# Altium PCB CrashDAQ For Hammond 1554H.PcbDoc (part 2 of 2)
Units mil, origin at the board's own origin, x right, y up, seen from the top; angles counter-clockwise.
Board outline 6580.35 x 4200 mil, 2 copper layers (Top Layer, Bottom Layer); 109 components, 89 nets, 487 pads, 126 vias.
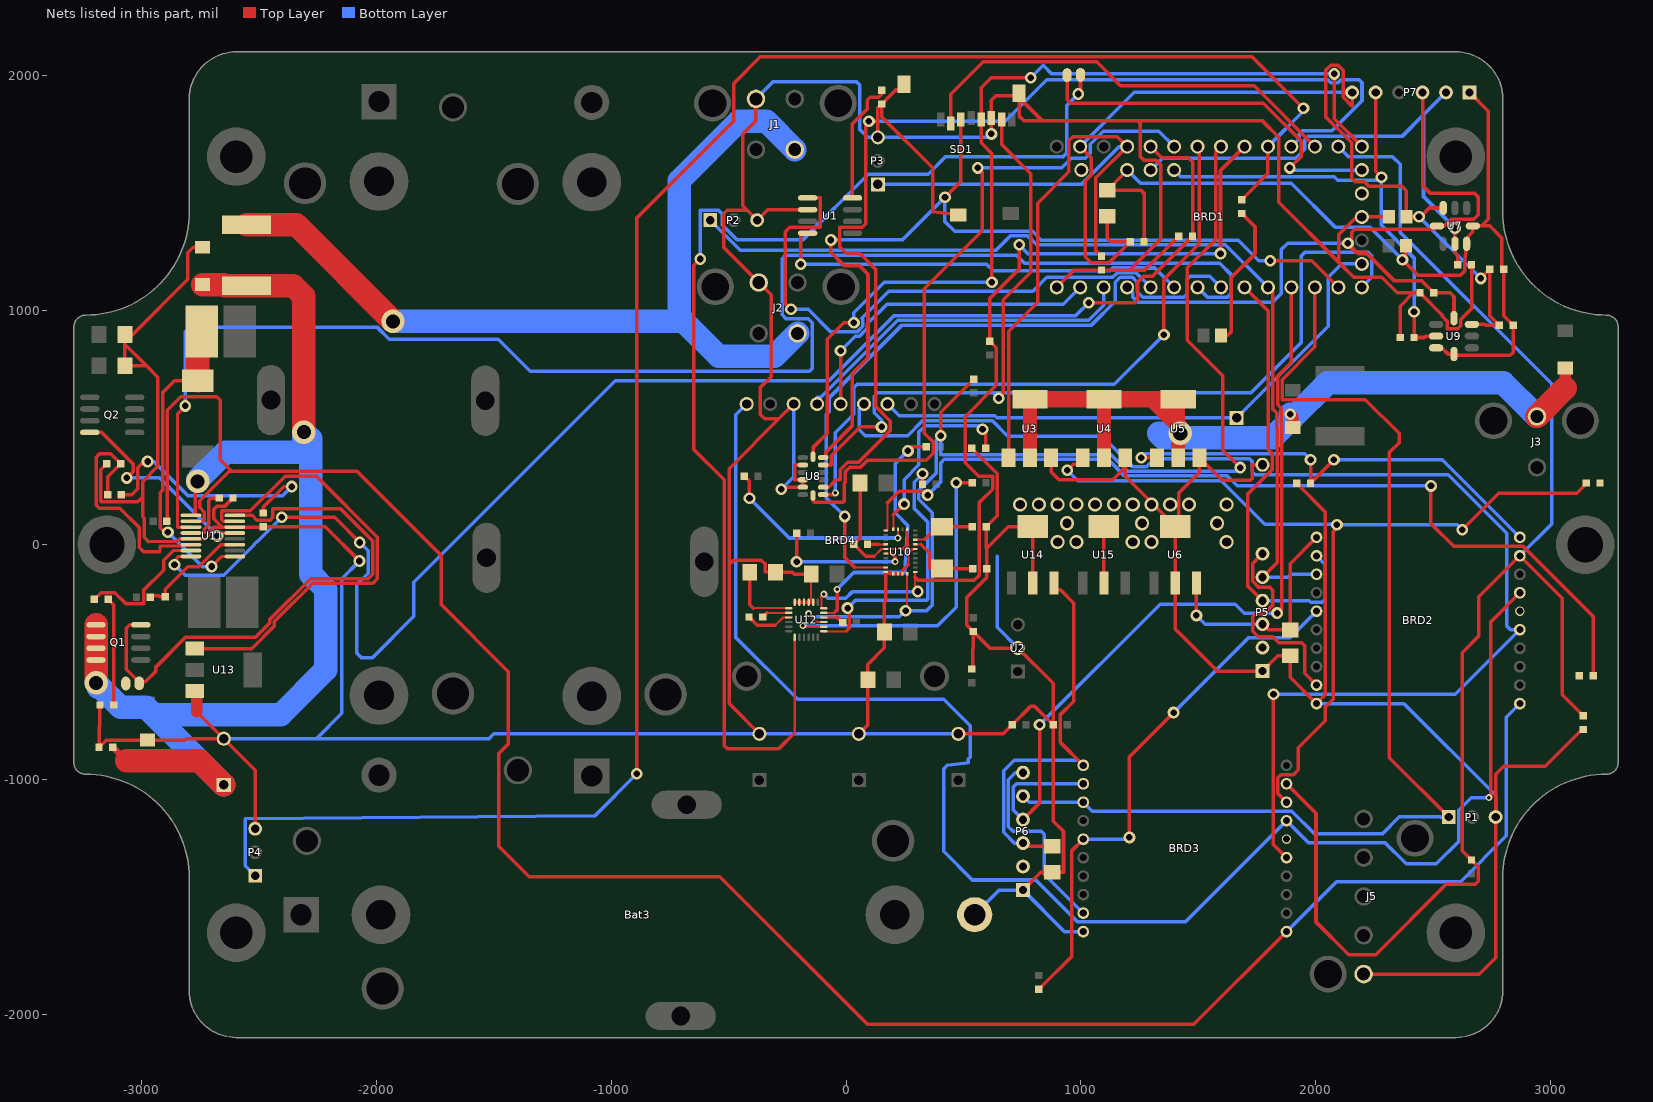
[diagram p2: the nets of this part, all layers, seen from the top]

## Via types
v1: diameter 50, hole 28, Top Layer to Bottom Layer, 80 vias
v2: diameter 60, hole 40, Top Layer to Bottom Layer, 19 vias
v3: diameter 100, hole 60, Top Layer to Bottom Layer, 19 vias
v4: diameter 30, hole 15, Top Layer to Bottom Layer, 8 vias

## Nets (pads, with @x,y where several pads share a name; then routed paths per layer and width w, separated by ;. In a path a pad name is that pad's centre, name@x,y a point inside that pad or via, vN(x,y) a via of type N, cw(c..) or ccw(c..) an arc to the next point about the centre after c; other vN are vias at no path point) (continued)
GND: Bat3.2 Batt1.2 BRD1.14 BRD1.17 BRD2.10 BRD3.10 BRD4.7 C3.2 C4.2 C5.1 C6.1 C7.2 C8.1 C9.1 C10.1 C12.1 C16.2 C17.1 C18.1 C19.2 C20.1 C21.1 C22.1 C23.1 C24.1 C25.1 C26.1 C27.1 C28.1 C29.1 C30.1 C31.1 C32.1 D3.1 J1.4 J2.4 J5.5 JP2.2 L2.1 NTC1.1 P1.3 P2.3 P3.3 P4.3 P5.1 P6.1 R1.1 R4.1 R8.1 R9.1 R10.1 R20.2 R21.1 R22.1 R26.1 SD1.6 U1.2 U2.2 U3.3 U4.3 U5.3 U6.2 U6.4 U8.2 U8.4 U8.5 U10.2 U10.10 U10.15 U10.16 U10.17 U10.18 U10.25 U11.5 U11.14 U12.2 U12.3 U12.4 U12.5 U12.6 U13.3 U14.2 U14.4 U15.2 U15.4 Z2.2 | length 33916.9
  Top Layer w8.86: C23.1@-148.62,-125 -148.62,-236.22 U12.2@-139.76,-245.08 ; 119.57,-49.54 150.85,-18.27 U10.10@169.54,-18.27 244.07,-18.27 ; U10.18@240.89,-124.53 240.89,-109.54 ; 260.58,-1.76 U10.2@260.58,65.47 265.3,-18.27 U10.25@294.48,-18.27 265.57,-31.04 265.57,-84.86
  Top Layer w14.17: -2972.42,13.25 -2851.08,13.25 -2839.43,24.9 U11.5@-2791.34,24.9 -2730.93,24.9 -2715.71,40.11 -2715.71,56.46 -2697.27,74.9 -2658.4,74.9 ; -2693.43,109.92 -2658.4,74.9 ; U11.14@-2604.33,74.9 -2658.4,74.9
  Top Layer w15: C22.1@-3179.13,-683.07 -3179.13,-771.61 -3183.07,-775.54 C18.1@-3183.07,-863.19 -3152.56,-832.68 D3.1@-2976.38,-832.68 -2817.43,-832.68 -2811.52,-826.77 C16.2@-2651.58,-826.77 ; C21.1@-3149.61,345.47 -3175.43,319.65 -3175.43,184.46 -3174.43,183.46 -3018.43,183.46 -2997.43,204.46 ; -2972.42,13.25 -2990.63,31.46 -2990.63,111.78 -2997.43,118.57 -2997.43,204.46 ; U13.3@-2775.59,-624.02 U13.3@-2766.73,-624.02 ; -2766.73,-711.61 C16.2@-2651.58,-826.77 ; Z2.2@-2742.13,1267.27 -2781.12,1267.27 -2804.43,1243.96 -2804.43,1130.46 -3039.21,895.67 C29.1@-3072.83,895.67 -3072.83,853.72 ; -2693.43,109.92 -2693.43,150.5 -2679.19,164.73 -2646.29,164.73 R20.2@-2612.21,198.82 ; U11.14@-2604.33,74.9 -2489.84,74.9 -2489.84,75.79 NTC1.1@-2483.27,75.79 -2218.76,75.79 v1(-2073.43,-69.54) ; P4.3@-2517.72,-1210.43 -2517.72,-960.63 C16.2@-2651.58,-826.77 ; J1.4@-383.86,1899.6 -383.86,1806.82 -440.43,1750.25 -440.43,1444.56 -421.32,1425.46 ; C7.2@-369.1,-806.1 -498.43,-676.77 -498.43,-84.54 ; v1(-276.43,236.46) -267.8,245.08 U8.5@-183.96,245.08 U8.4@-183.96,276.57 -218.43,276.57 -219.43,277.57 -219.43,338.57 -218.43,339.57 U8.2@-183.96,339.57 ; BRD4.7@-223.3,599.28 -286.12,536.46 ; U12.6@-218.5,-245.08 U12.5@-198.82,-245.08 U12.4@-179.13,-245.08 U12.3@-159.45,-245.08 U12.2@-139.76,-245.08 ; U1.2@-163.39,1427.56 -334.06,1427.56 P2.3@-378.74,1382.87 -421.32,1425.46 ; C23.1@-148.62,-125 -220.55,-125 -228.43,-117.13 C19.2@-300.2,-117.13 -343.43,-116.13 -343.43,-83.04 -360.93,-65.54 -479.43,-65.54 -498.43,-84.54 ; C4.2@54.63,-806.1 93.5,-767.23 C32.1@93.5,-575.79 93.5,-509.54 163.39,-439.66 C28.1@163.39,-372.05 163.39,-247.54 169.54,-241.39 U10.15@169.54,-116.69 181.57,-116.69 189.41,-124.53 U10.16@201.52,-124.53 U10.17@221.21,-124.53 U10.18@240.89,-124.53 ; C24.1@60.04,262.79 60.04,29.53 C17.1@32.48,1.97 83.99,-49.54 119.57,-49.54 ; P3.3@135.83,1735.43 135.83,1861.22 R1.1@152.56,1877.95 ; 240.89,-109.54 265.57,-84.86 ; 244.07,-18.27 260.58,-1.76 ; SD1.6@247.05,1962.6 247.05,1939.46 214.06,1939.46 R1.1@152.56,1877.95 ; SD1.6@477.36,1405.51 369.07,1418.01 369.07,1605.96 152.56,1822.47 R1.1@152.56,1877.95 ; C3.2@478.34,-806.1 669.29,-806.1 C9.1@707.68,-767.72 787.85,-687.54 802.7,-687.54 C8.1@882.87,-767.72 ; R21.1@536.42,410.43 644.7,302.15 644.7,123.05 C25.1@597.44,75.79 597.44,-12.58 599.41,-14.54 ; C6.1@539.37,-515.75 539.37,-444.54 542.32,-441.59 C5.1@542.32,-370.08 ; v1(619.49,1750.46) SD1.6@619.49,1818.9 619.49,1893.96 638.99,1913.46 SD1.6@737.2,1913.46 ; SD1.6@737.2,1923.23 SD1.6@737.2,1913.46 ; P6.1@753.94,-1471.46 829.72,-1395.67 C31.1@877.95,-1395.67 925.57,-1395.67 926.57,-1394.67 926.57,-1221.54 882.87,-1177.84 C8.1@882.87,-767.72 ; U14.2@795.27,-163.39 U14.4@795.27,76.77 690.72,76.77 599.41,-14.54 ; U3.3@874.02,371.06 874.02,309.97 907.53,276.46 1137.07,276.46 1189.96,329.34 ; BRD1.14@897.83,1096.46 971.65,1170.28 R8.1@1088.58,1170.28 1208.39,1170.28 ; U15.2@1098.92,-163.39 U15.4@1098.92,76.77 ; U4.3@1189.96,371.06 1189.96,329.34 ; C20.1@1417.32,1314.96 1272.64,1170.28 1208.39,1170.28 ; Batt1.2@1774.61,340.55 1731.06,340.55 1729.96,339.46 1729.96,281.46 1722.96,274.46 1602.51,274.46 U5.3@1505.9,371.06 1505.9,308.46 1418.57,221.13 1418.57,76.77 U6.4@1402.56,76.77 ; R10.1@1920.28,261.81 2042.57,139.51 2042.57,-639.51 BRD2.10@2004.92,-677.16 1892.72,-564.96 C27.1@1892.72,-473.43 1839.57,-473.43 P5.1@1774.61,-538.39 1581.4,-538.39 1402.56,-359.54 U6.2@1402.56,-163.39 U6.4@1402.56,76.77 ; BRD1.17@2197.83,1396.46 2254.57,1396.46 2255.76,1397.64 ; J5.5@2205.71,-1829.73 2698.39,-1829.73 2767.91,-1760.21 P1.3@2767.91,-1160.43 2767.91,-978.9 2803.27,-943.54 2979.68,-943.54 R4.1@3136.81,-786.42 ; L2.1@2313.02,1397.64 2255.76,1397.64 ; C12.1@2361.22,882.87 2361.22,1016.73 2417.32,1072.83 R22.1@2445.87,1072.83 ; C10.1@2665.35,1192.91 2665.35,1005.23 2619.57,959.46 2619.57,932.46 2606.57,919.46 2563.57,919.46 2562.57,920.46 2562.57,951.2 2540.35,973.43 2540.35,978.35 R22.1@2445.87,1072.83 ; -3072.83,853.72 -2980.93,761.81 ; -3072.83,853.72 C30.1@-3072.83,761.81 -2980.93,761.81 ; -2997.43,204.46 -2997.43,268.5 -2932.46,333.47 -2932.46,713.34 -2980.93,761.81 ; -498.43,-84.54 -498.43,324.15 -286.12,536.46 ; -421.32,1425.46 -505.93,1425.46 -521.43,1409.96 -521.43,1266.5 J2.4@-372.05,1117.12 -319.43,1064.5 -319.43,715.46 -366.43,668.46 -366.43,556.46 -346.43,536.46 -286.12,536.46 ; C5.1@542.32,-370.08 612.6,-440.35 U2.2@732.28,-440.35 882.87,-590.94 C8.1@882.87,-767.72 ; C5.1@542.32,-370.08 513.57,-341.33 513.57,-225.77 599.41,-139.94 C26.1@599.41,-102.36 599.41,-14.54 ; SD1.6@737.2,1905.46 SD1.6@737.2,1913.46 ; SD1.6@737.2,1905.46 737.2,1826.83 756.57,1807.46 835.2,1807.46 ; SD1.6@737.2,1905.46 835.2,1807.46 ; 835.2,1807.46 1241.07,1807.46 ; 1189.96,329.34 1189.96,291.46 1383.96,97.46 1383.96,76.77 U6.4@1402.56,76.77 ; 1208.39,1170.28 1340.57,1302.46 1340.57,1618.96 1320.57,1638.96 1269.07,1638.96 1254.57,1653.46 1254.57,1793.96 1241.07,1807.46 ; 1241.07,1807.46 1772.4,1807.46 1843.57,1736.28 1843.57,1459.46 2100.33,1202.7 ; 2100.33,1202.7 2163.57,1139.46 2282.57,1139.46 2349.2,1072.83 R22.1@2445.87,1072.83 ; 2100.33,1202.7 2100.33,1322.22 2175.76,1397.64 2255.76,1397.64
  Top Layer w50: -2766.73,-711.61 U13.3@-2766.73,-624.02
  Bottom Layer w15: C16.2@-2651.58,-826.77 -2256.43,-826.77 ; v1(-2073.43,-69.54) -2148.43,-144.54 -2148.43,-718.77 -2256.43,-826.77 ; J1.4@-383.86,1899.6 -310.01,1973.46 44.07,1973.46 58.57,1958.96 58.57,1768.96 92.1,1735.43 P3.3@135.83,1735.43 604.46,1735.43 v1(619.49,1750.46) ; v1(-276.43,236.46) -223.3,289.59 BRD4.7@-223.3,599.28 ; C3.2@478.34,-806.1 477.79,-805.54 55.19,-805.54 C4.2@54.63,-806.1 C7.2@-369.1,-806.1 -1500.76,-806.1 -1521.43,-826.77 -2256.43,-826.77 ; Bat3.2@548.19,-1576.77 653.5,-1471.46 P6.1@753.94,-1471.46 931.1,-1648.62 BRD3.10@1010.83,-1648.62 ; 643.7,-50.2 643.7,-351.77 U2.2@732.28,-440.35 ; BRD2.10@2004.92,-677.16 2377.47,-677.16 2767.91,-1067.6 P1.3@2767.91,-1160.43
  other v2: 901.57,11.46 981.57,11.46 1221.57,11.46 1301.57,11.46 1621.57,11.46 941.57,91.46 1261.57,91.46 1581.57,91.46 741.57,171.46 821.57,171.46 901.57,171.46 981.57,171.46 1061.57,171.46 1141.57,171.46 1221.57,171.46 1301.57,171.46 1381.57,171.46 1461.57,171.46 1621.57,171.46
NetBatt1_1: Batt1.1 BRD1.15 BRD4.3 | length 2439.6
  Bottom Layer w15: BRD4.3@176.7,599.28 227.03,548.96 633.81,548.96 642.21,540.55 1296.65,540.55 1296.95,540.85 1664.08,540.85 Batt1.1@1664.37,540.55 2054.57,930.75 2054.57,1139.46 2111.57,1196.46 BRD1.15@2197.83,1196.46
NetBRD1_1: BRD1.1 SD1.7 U8.12 | length 4559.7
  Top Layer w15: U8.12@-97.54,339.57 -64.39,339.57 -62.5,341.46 -62.5,379.46 60.01,501.97 v1(151.57,501.97) ; v1(650.57,624.46) 670.28,644.16 670.28,1044.16 787.57,1161.46 787.57,1580.46 662.79,1705.24 SD1.7@662.79,1811.02
  Bottom Layer w15: v1(151.57,501.97) 151.57,529.53 119.57,561.53 119.57,631.46 135.57,647.46 627.57,647.46 ; v1(650.57,624.46) 627.57,647.46 ; BRD1.1@2197.83,1096.46 2240.57,1139.2 2240.57,1231.46 2225.57,1246.46 1955.57,1246.46 1940.57,1231.46 1940.57,862.46 1725.57,647.46 627.57,647.46
NetBRD1_2: BRD1.2 SD1.3 U8.13 | length 3933.5
  Top Layer w15: U8.13@-97.54,371.06 -85.43,371.06 -85.43,394.46 25.57,505.46 25.57,728.33 93.57,796.33 93.57,1152.46 56.57,1189.46 -8.43,1189.46 -64.43,1245.46 v1(-64.43,1298.46) ; v1(421.57,1480.46) 489.57,1548.46 SD1.3@489.57,1811.02 ; v1(1807.57,1209.46) 1984.83,1209.46 BRD1.2@2097.83,1096.46
  Bottom Layer w15: v1(-64.43,1298.46) 239.57,1298.46 v1(421.57,1480.46) 421.57,1376.46 462.57,1335.46 795.07,1335.46 832.55,1297.98 1670.57,1297.98 1759.1,1209.46 v1(1807.57,1209.46)
NetBRD1_3: BRD1.3 BRD3.3 P1.1 P6.5 | length 4759.8
  Top Layer w15: BRD1.3@1997.83,1096.46 1997.83,842.72 1858.54,703.42 1858.54,619.05 1859.57,618.02 2213.01,618.02 2356.57,474.46 2356.57,434.46 2314.96,392.84 2314.96,-907.48 P1.1@2567.91,-1160.43
  Bottom Layer w15: P6.5@753.94,-1071.46 779.92,-1097.44 BRD3.3@1010.83,-1097.44 1048.93,-1135.54 1899.31,-1135.54 1994.57,-1230.81 2286.31,-1230.81 2357.57,-1159.54 2532.57,-1159.54 2533.46,-1160.43 P1.1@2567.91,-1160.43
NetBRD1_4: BRD1.4 BRD3.2 P6.4 | length 3563.8
  Top Layer w15: P6.4@753.94,-1171.46 824.57,-1100.82 v1(824.57,-767.54) ; v1(1836.57,-291.54) 1857.57,-270.54 1857.57,517.96 1855.07,520.46 1855.07,581.48 1838.54,598.02 1838.54,718.02 1897.83,777.31 BRD1.4@1897.83,1096.46
  Bottom Layer w15: P6.4@753.94,-1171.46 711.57,-1129.09 711.57,-1033.65 726.52,-1018.7 BRD3.2@1010.83,-1018.7 ; v1(824.57,-767.54) 1338.57,-253.54 1658.57,-253.54 1696.57,-291.54 v1(1836.57,-291.54)
NetBRD1_5: BRD1.5 BRD2.3 P2.1 P5.5 | length 4058.6
  Top Layer w15: P5.5@1774.61,-138.39 1837.11,-75.88 1837.11,495.92 1835.07,497.96 1835.07,561.48 1818.54,578.02 1818.54,1073.68 1819.07,1074.22 1819.07,1075.22 BRD1.5@1797.83,1096.46
  Bottom Layer w15: P2.1@-578.74,1382.87 -450.32,1254.46 639.07,1254.46 700.07,1315.46 775.07,1315.46 812.55,1277.98 1616.31,1277.98 BRD1.5@1797.83,1096.46 ; P5.5@1774.61,-138.39 1882.57,-138.39 1894.98,-125.98 BRD2.3@2004.92,-125.98
NetBRD1_6: BRD1.6 BRD2.2 P5.4 | length 1928.7
  Top Layer w15: BRD1.6@1697.83,1096.46 1798.54,995.75 1798.54,405.17 1817.11,386.6 1817.11,321.99 1712.58,217.46 1712.58,-176.36 P5.4@1774.61,-238.39
  Bottom Layer w15: P5.4@1774.61,-238.39 1974.42,-238.39 1980.57,-244.54 2029.07,-244.54 2042.57,-231.04 2042.57,-84.9 BRD2.2@2004.92,-47.24
NetBRD1_7: BRD1.7 U10.14 | length 2993.3
  Top Layer w8.86: 37.04,-97.01 U10.14@169.54,-97.01
  Top Layer w15: v1(-5.43,120.46) -5.43,-54.54 37.04,-97.01
  Bottom Layer w15: v1(-5.43,120.46) -83.43,198.46 -83.43,556.46 -72.43,567.46 -72.43,624.96 238.57,935.96 1046.07,935.96 1147.57,1037.46 1147.57,1118.96 1167.57,1138.96 1220.57,1138.96 1240.57,1118.96 1240.57,1077.46 1264.07,1053.96 1438.57,1053.96 1453.57,1068.96 1453.57,1131.46 1466.57,1144.46 1549.83,1144.46 BRD1.7@1597.83,1096.46
NetBRD1_8: BRD1.8 U11.3 | length 6445.3
  Top Layer w14.17: -2848.43,558.46 -2848.43,75.9 -2847.43,74.9 U11.3@-2791.34,74.9
  Top Layer w15: -2848.43,558.46 v1(-2815.43,591.46)
  Bottom Layer w15: v1(-2815.43,591.46) -2815.43,906.46 -2794.43,927.46 -1998.43,927.46 -1946.43,875.46 -1482.43,875.46 -1345.43,738.46 -155.93,738.46 -143.43,750.96 -143.43,946.46 -160.43,963.46 -255.93,963.46 -272.43,979.96 -272.43,1218.96 -257.93,1233.46 726.57,1233.46 760.57,1199.46 1592.57,1199.46 1640.57,1151.46 1640.57,1068.96 1625.57,1053.96 1540.33,1053.96 BRD1.8@1497.83,1096.46
NetBRD1_9: BRD1.9 U1.4 | length 1802.1
  Top Layer w15: v1(-192.43,1195.46) -192.43,1327.56 U1.4@-163.39,1327.56
  Bottom Layer w15: v1(-192.43,1195.46) 598.51,1195.46 626.74,1167.22 1124.72,1167.22 1136.45,1178.96 1315.33,1178.96 BRD1.9@1397.83,1096.46
NetBRD1_10: BRD1.10 U1.1 | length 2402.5
  Top Layer w15: v1(-234.43,1002.96) -259.43,1027.96 -259.43,1332.46 -239.43,1352.46 -110.43,1352.46 -109.43,1353.46 -109.43,1476.56 -110.43,1477.56 U1.1@-163.39,1477.56
  Bottom Layer w15: v1(-234.43,1002.96) -161.69,1002.96 -67.1,908.37 49,908.37 70.96,930.33 70.96,961.4 67.57,964.79 67.57,965.46 182.57,1080.46 796.57,1080.46 855.57,1139.46 1136.95,1139.46 1156.45,1158.96 1235.33,1158.96 BRD1.10@1297.83,1096.46
NetBRD1_11: BRD1.11 P7.3 R22.2 U7.4 U9.4 | length 3559.5
  Top Layer w15: v1(2138.57,1284.46) v1@2154.57,1268.46 ; P7.3@2456.5,1927.16 2456.5,1530.53 2488.57,1498.46 2676.57,1498.46 2693.57,1481.46 2693.57,1406.46 2674.57,1387.46 2579.15,1387.46 2549.96,1358.27 U7.4@2518.11,1358.27 2502.57,1358.27 2502.57,1344.46 2167.57,1344.46 2154.57,1331.46 v1@2154.57,1268.46 ; U9.4@2590.55,965.16 2590.55,1056.46 2574.17,1072.83 R22.2@2504.92,1072.83 2452.34,1125.41 ; v1@2154.57,1268.46 2176.57,1246.46 ; v1@2154.57,1268.46 2154.57,1260.96 2169.07,1246.46 2176.57,1246.46 ; 2176.57,1246.46 2183.57,1239.46 2220.07,1239.46 2334.07,1125.46 2336.57,1125.46 ; 2176.57,1246.46 2215.57,1246.46 2336.57,1125.46 ; 2336.57,1125.46 2336.62,1125.41 2452.34,1125.41 ; 2336.57,1125.46 2452.3,1125.46 2452.34,1125.41
  Bottom Layer w15: BRD1.11@1197.83,1096.46 1220.76,1073.53 1220.76,1056.46 1243.26,1033.96 1818.57,1033.96 1853.57,1068.96 1853.57,1256.46 1881.57,1284.46 v1(2138.57,1284.46)
NetBRD1_12: BRD1.12 BRD4.6 | length 1488.8
  Bottom Layer w15: BRD4.6@-123.3,599.28 -123.3,627.96 -108.43,627.96 219.57,955.96 1034.07,955.96 1097.83,1019.72 BRD1.12@1097.83,1096.46
NetBRD1_13: BRD1.13 BRD4.5 | length 1371.2
  Top Layer w15: BRD4.5@-23.3,599.28 v1(-23.3,826.59)
  Bottom Layer w15: v1(-23.3,826.59) 38.48,888.37 57.28,888.37 90.96,922.05 90.96,940.85 174.57,1024.46 925.83,1024.46 BRD1.13@997.83,1096.46
NetBRD1_18: BRD1.18
NetBRD1_19: BRD1.19 JP1.1 | length 1621.9
  Top Layer w15: JP1.1@941.96,2000.98 941.96,1896.46 956.96,1881.46 1778.07,1881.46 1940.57,1718.96 1940.57,1655.46 v1(1890.57,1605.46)
  Bottom Layer w15: v1(1890.57,1605.46) 1899.57,1596.46 BRD1.19@2197.83,1596.46
NetBRD1_20: BRD1.20 SD1.5 U8.14 | length 4119
  Top Layer w15: U8.14@-140.75,374.9 -140.75,414.13 -80.43,474.46 -80.43,874.8 -9.36,945.87 v1(33.46,945.87) ; v1(621.57,1117.96) 621.57,1667.06 576.18,1712.46 SD1.5@576.18,1811.02 576.18,1947.46 618.18,1989.46 v1(787.57,1989.46) ; v1(2080.71,2005.91) 2080.71,1814.32 2198.57,1696.46 BRD1.20@2197.83,1696.46
  Bottom Layer w15: v1(33.46,945.87) 33.46,988.69 162.73,1117.96 v1(621.57,1117.96) ; v1(787.57,1989.46) 840.57,2042.46 877.13,2005.91 v1(2080.71,2005.91)
NetBRD1_21: BRD1.21 BRD2.19 BRD3.19 R3.2 R4.2 | length 6116.8
  Top Layer w15: BRD3.19@1876.97,-1018.7 2002.57,-1144.31 2002.57,-1607.54 2142.08,-1747.05 2257.07,-1747.05 2556.57,-1447.54 2681.57,-1447.54 2694.57,-1434.54 2694.57,-1372.73 R3.2@2665.35,-1343.51 2625.88,-1304.04 2625.88,-459.75 2696.57,-389.06 2696.57,-221.73 BRD2.19@2871.06,-47.24 3052.17,-228.35 3052.17,-638.78 R4.2@3141.73,-728.35
  Bottom Layer w15: BRD1.21@2097.83,1696.46 2140.83,1653.46 2328.57,1653.46 2361.57,1620.46 2361.57,1330.46 3006.57,685.46 3006.57,88.27 BRD2.19@2871.06,-47.24
NetBRD1_22: BRD1.22 SD1.2 | length 1882.2
  Top Layer w15: SD1.2@446.26,1795.27 446.26,1918.96 584.76,2057.46 1067.57,2057.46 1169.57,1955.46 1738.83,1955.46 BRD1.22@1997.83,1696.46
NetBRD1_23: BRD1.23 U8.9 | length 4620.5
  Top Layer w15: U8.9@-97.54,245.08 -74.43,245.08 -42.5,277 -23.96,277 -23.96,319.97 6.8,350.73 53.37,350.73 189.07,486.44 189.07,525.96 127.57,587.46 127.57,1172.27 58.11,1241.74 1.29,1241.74 -26.43,1269.46 -26.43,1351.46 -25.43,1352.46 69.07,1352.46 84.57,1367.96 84.57,1791.46 v1(97.57,1804.46)
  Bottom Layer w15: v1(97.57,1804.46) 677.72,1804.46 854.72,1981.46 2052.12,1981.46 2065.18,1968.41 2096.24,1968.41 2109.29,1981.46 2186.07,1981.46 2198.57,1968.96 2198.57,1891.46 2070.53,1763.41 1944.07,1763.41 1930.88,1750.22 1930.88,1729.5 BRD1.23@1897.83,1696.46
NetBRD1_24: BRD1.24 P4.1 R2.2 | length 8178.7
  Top Layer w15: v1(-891.43,-976.54) -891.43,1392.25 -477.66,1806.02 -477.66,1966.46 -365.66,2078.46 1729.57,2078.46 v1(1948.83,1859.2) ; R2.2@1686.02,1470.47 1797.83,1582.28 BRD1.24@1797.83,1696.46
  Bottom Layer w15: P4.1@-2517.72,-1410.43 -2560.43,-1367.72 -2560.43,-1168.54 -1070.93,-1156.04 v1(-891.43,-976.54) ; BRD1.24@1797.83,1696.46 1948.83,1847.46 v1(1948.83,1859.2)
NetBRD1_25: BRD1.25 R6.1 U10.20 U12.24 | length 3877.9
  Top Layer w8.86: -105.43,-221.54 -105.43,-270.67 U12.24@-94.49,-270.67 ; v1@293.57,-187.04 293.57,-138.54 293.57,-116.69 U10.20@294.48,-116.69
  Top Layer w15: -105.43,-221.54 v4(-94.43,-210.54) ; v1@293.57,-187.04 v1(306.07,-199.54) ; 293.57,-138.54 306.57,-151.54 546.64,-151.54 568.6,-129.58 568.6,180.56 624.7,236.66 624.7,290.9 623.57,292.03 565,292.03 507.57,349.46 507.57,545.67 640.57,678.67 640.57,838.75 R6.1@612.2,867.12 612.2,1049.09 737.57,1174.46 v1(737.57,1277.96) ; v1(1595.57,1240.46) 1595.57,1594.2 BRD1.25@1697.83,1696.46
  Bottom Layer w15: v4(-94.43,-210.54) -76.93,-228.04 -0.91,-228.04 27.59,-199.54 v1(306.07,-199.54) ; v1(737.57,1277.96) 775.07,1240.46 v1(1595.57,1240.46)
NetBRD1_26: BRD1.26 R5.1 U10.19 U12.21 | length 4788.9
  Top Layer w8.86: v4(-159.43,-293.73) -123.43,-329.73 U12.21@-94.49,-329.73 ; v1@254.07,-280.54 260.58,-274.04 U10.19@260.58,-124.53
  Top Layer w15: v1(253.57,-281.04) v1@254.07,-280.54 ; v1(403.57,463.96) 403.57,564.99 R5.1@544.29,705.71 ; BRD1.26@1597.83,1696.46 1575.57,1674.2 1575.57,1300.46 1454.57,1179.46 1454.57,870.46 1605.57,719.46 1605.57,402.96 v1(1680.07,328.46)
  Bottom Layer w15: v4(-159.43,-293.73) -145.61,-307.54 227.07,-307.54 v1(253.57,-281.04) ; v1@254.07,-280.54 344.07,-280.54 367.57,-257.04 367.57,136.46 310.07,193.96 310.07,230.96 384.57,305.46 384.57,444.96 v1(403.57,463.96) 403.57,383.96 1129.07,383.96 1200.07,312.96 1664.57,312.96 v1(1680.07,328.46)
NetBRD1_27: BRD1.27 U8.8 | length 2818
  Top Layer w15: U8.8@-97.54,213.58 -52.8,213.58 v4(-45.43,220.96) ; v1(1354.57,894.46) 1354.57,1131.46 1505.57,1282.46 1505.57,1688.72 BRD1.27@1497.83,1696.46
  Bottom Layer w15: v4(-45.43,220.96) -45.43,476.46 33.57,555.46 33.57,668.96 48.07,683.46 1143.57,683.46 v1(1354.57,894.46)
NetBRD1_28: BRD1.28 U8.7 | length 2990.2
  Top Layer w15: U8.7@-140.75,209.74 -140.75,185.46 -135.84,180.55 -12.18,180.55 -7.27,185.46 -7.27,261.8 -3.96,265.12 -3.96,311.69 15.08,330.73 61.65,330.73 91.22,360.3 341.57,360.3 371.57,390.3 371.57,437.46 333.57,475.46 333.57,1090.46 581.07,1337.96 581.07,1585.96 v1(561.57,1605.46)
  Bottom Layer w15: v1(561.57,1605.46) 919.33,1605.46 960.33,1646.46 1019.07,1646.46 1040.57,1667.96 1040.57,1706.46 1096.57,1762.46 1331.83,1762.46 BRD1.28@1397.83,1696.46
NetBRD1_29: BRD1.29 C20.2 U11.8 | length 6521.6
  Top Layer w14.17: v1(-2861.43,-85.54) -2861.43,-68.1 -2843.43,-50.1 U11.8@-2791.34,-50.1
  Top Layer w15: v1(-2404.93,116.46) -2178.93,116.46 v1(-2071.93,9.46) ; v1(1034.57,1031.46) 1229.57,1031.46 1242.07,1043.96 1242.07,1118.96 1267.57,1144.46 1305.87,1144.46 C20.2@1476.38,1314.96 1476.38,1631.46 1458.42,1649.41 1344.88,1649.41 BRD1.29@1297.83,1696.46
  Bottom Layer w15: v1(-2861.43,-85.54) -2816.43,-130.54 -2651.93,-130.54 -2521.52,-0.13 -2521.52,1.45 -2508.34,14.63 -2506.76,14.63 v1(-2404.93,116.46) ; v1(-2071.93,9.46) -2035.93,-26.54 -2035.93,-121.23 -2085.93,-171.23 -2085.93,-460.04 -2064.93,-481.04 -2017.93,-481.04 -1841.43,-304.54 -1841.43,-159.54 -983.43,698.46 -72.43,698.46 205.57,976.46 979.57,976.46 v1(1034.57,1031.46)
NetBRD1_30: BRD1.30 P3.1 R8.2 U3.1 | length 3390.8
  Top Layer w15: U3.1@692.91,371.06 692.91,910.12 816.57,1033.78 816.57,1455.46 949.57,1588.46 949.57,1721.46 967.07,1738.96 1155.33,1738.96 BRD1.30@1197.83,1696.46 1064.57,1563.2 1064.57,1253.34 R8.2@1088.58,1229.33
  Bottom Layer w15: P3.1@135.83,1535.43 1003.55,1535.43 1164.57,1696.46 BRD1.30@1197.83,1696.46
NetBRD1_32: BRD1.32 C1.1 C2.1 C11.1 C13.1 L2.2 P7.6 U7.3 U9.3 | length 4353.6
  Top Layer w15: BRD1.32@997.83,1696.46 1045.57,1648.72 1045.57,1574.49 1019.57,1548.49 1019.57,1226.46 1045.57,1200.46 1119.75,1200.46 C2.1@1210.63,1291.34 1127.69,1291.34 1113.19,1305.84 C1.1@1113.19,1399.61 ; P7.6@2156.5,1927.16 2156.5,1871.38 2154.57,1869.46 2118.21,1905.82 2118.21,2021.44 2096.24,2043.41 2065.18,2043.41 2043.21,2021.44 2043.21,1823.54 2154.57,1712.17 2154.57,1560.96 2169.07,1546.46 2208.57,1546.46 2228.57,1526.46 2369.07,1526.46 2387.83,1507.7 L2.2@2387.83,1397.64 v1(2441.57,1397.64) 2447.57,1397.64 2484.58,1434.65 U7.3@2544.49,1434.65 ; U9.3@2666.93,938.78 2722.57,938.78 2726.32,935.04 C13.1@2783.46,935.04 2743.11,975.39 C11.1@2743.11,1173.23 v1(2704.55,1134.66)
  Bottom Layer w15: BRD1.32@997.83,1696.46 1228.54,1927.16 P7.6@2156.5,1927.16 ; v1(2441.57,1397.64) v1(2704.55,1134.66)
NetBRD1_34: BRD1.34
NetBRD1_35: BRD1.35 C1.2 C2.2 C11.2 C13.2 L1.1 P7.1 U7.7 U7.8 U9.7 U9.8 | length 4010.3
  Top Layer w15: BRD1.35@1197.83,1596.46 1197.83,1595.1 1113.19,1510.46 C1.2@1113.19,1509.84 1256.57,1509.84 1269.68,1496.73 C2.2@1269.68,1291.34 ; L1.1@2385.79,1273.62 2385.79,1229.12 v1(2370.85,1214.18) 2436.07,1148.96 2619.07,1148.96 2635.57,1165.46 2635.57,1212.54 U7.7@2644.49,1281.89 2644.49,1306.46 2670.87,1332.83 U7.8@2670.87,1358.27 2708.3,1358.27 ; U9.7@2514.17,838.78 2538.57,838.78 2564.95,812.4 U9.8@2590.55,812.4 2590.55,806.46 2830.02,806.46 2842.52,818.96 C13.2@2842.52,935.04 2802.17,975.39 C11.2@2802.17,1173.23 2793.92,1173.23 2793.92,1306.92 2742.57,1358.27 2708.3,1358.27 ; P7.1@2656.5,1927.16 2736.57,1847.09 2736.57,1386.54 2708.3,1358.27
  Bottom Layer w15: BRD1.35@1197.83,1596.46 1254.83,1539.46 1897.57,1539.46 2083.57,1353.46 2231.57,1353.46 v1(2370.85,1214.18)
NetBRD2_1: BRD2.1 C27.2 P5.3 U6.3 | length 1004.5
  Top Layer w15: v1(1493.11,-301.54) U6.3@1493.11,-163.39 ; P5.3@1774.61,-338.39 1799.41,-363.19 C27.2@1892.72,-363.19 1892.72,-80.71 BRD2.1@2004.92,31.5
  Bottom Layer w15: v1(1493.11,-301.54) 1529.95,-338.39 P5.3@1774.61,-338.39
NetBRD2_5: BRD2.5 BRD3.5 R7.1 | length 2316.4
  Top Layer w15: R7.1@820.86,-1894.68 962.57,-1752.97 962.57,-1303.17 BRD3.5@1010.83,-1254.92 ; v1(1207.57,-1247.54) 1207.57,-903.54 v1(1395.57,-715.54)
  Bottom Layer w15: BRD3.5@1010.83,-1254.92 1200.2,-1254.92 v1(1207.57,-1247.54) ; v1(1395.57,-715.54) 1715.57,-395.54 1892.84,-395.54 BRD2.5@2004.92,-283.46
NetBRD2_9: BRD2.9 P5.6 | length 903.2
  Top Layer w15: P5.6@1774.61,-38.39 1732.58,-80.41 1732.58,-156.42 1756.57,-180.41 1804.44,-180.41 1817.57,-193.54 1817.57,-257.04 1781.07,-293.54 1745.07,-293.54 1732.57,-306.04 1732.57,-368.54 1756.57,-392.54 1818.57,-392.54 1844.57,-418.54 1942.07,-418.54 1954.57,-431.04 1954.57,-548.08 BRD2.9@2004.92,-598.42
NetBRD2_11: BRD2.11 BRD3.11 R19.1 U11.2 | length 9332.4
  Top Layer w14.17: U11.2@-2791.34,99.9 -2741.46,99.9 -2734.96,106.4 -2734.96,138.99 -2754.47,158.5 -2754.47,186.41 -2628.43,312.46
  Top Layer w15: R19.1@-2893.7,99.41 -2892.43,99.41 -2892.43,572.46 -2834.43,630.46 -2680.93,630.46 -2666.43,615.96 -2666.43,361.46 -2617.43,312.46 ; -2628.43,312.46 -2617.43,312.46 ; BRD3.11@1876.97,-1648.62 1482.05,-2043.54 91.57,-2043.54 -537.43,-1414.54 -1350.22,-1414.54 -1479.33,-1285.43 -1479.33,-889.76 -1438.98,-849.41 -1438.98,-541.34 -1725.39,-254.92 -1725.39,-46.26 -2084.11,312.46 -2617.43,312.46
  Bottom Layer w15: BRD3.11@1876.97,-1648.62 2090.05,-1435.54 2618.57,-1435.54 2813.57,-1240.54 2813.57,-734.65 BRD2.11@2871.06,-677.16
NetBRD2_15: BRD2.15 BRD3.15 BRD4.4 | length 5508
  Top Layer w15: v1(1821.57,-637.54) 1819.47,-639.65 1819.47,-1276.16 BRD3.15@1876.97,-1333.66
  Bottom Layer w15: BRD4.4@76.7,599.28 56.57,579.15 56.57,489.96 82.06,464.47 262.59,464.47 327.07,528.96 622.57,528.96 689.07,462.46 1091.07,462.46 1220.57,332.96 1281.57,332.96 1315.57,366.96 1719.07,366.96 1731.57,354.46 1731.57,310.55 1744.07,298.05 2565.98,298.05 2815.57,48.46 2815.57,-346.2 2831.57,-362.2 BRD2.15@2871.06,-362.2 2595.72,-637.54 v1(1821.57,-637.54)
NetBRD2_16: BRD2.16
NetBRD2_17: BRD2.17 BRD3.17 BRD4.9 | length 6620.2
  Top Layer w15: v4(2739.17,-1077.76) 2744.36,-1077.76 2746.57,-1075.54 2746.57,-329.21 BRD2.17@2871.06,-204.72
  Bottom Layer w15: BRD4.9@-423.3,599.28 -469.43,553.15 -469.43,-395.54 -206.43,-658.54 415.57,-658.54 528.67,-771.63 528.67,-905.34 521.57,-912.43 521.57,-928.54 431.57,-939.54 415.57,-955.54 415.57,-1306.04 538.32,-1428.79 808.57,-1428.79 987.33,-1607.54 1445.6,-1607.54 BRD3.17@1876.97,-1176.18 1970.33,-1269.54 2296.57,-1269.54 2386.57,-1359.54 2515.57,-1359.54 2610.57,-1264.54 2610.57,-1131.04 2663.86,-1077.76 v4(2739.17,-1077.76)
NetBRD2_20: BRD2.20 R10.2 U5.1 | length 1976.7
  Top Layer w15: v1(1257.57,370.46) 1324.8,370.46 U5.1@1324.8,371.06 ; v1(1979.57,361.46) 1979.33,361.21 R10.2@1979.33,261.81 v1(2078.98,361.46)
  Bottom Layer w15: v1(1257.57,370.46) 1274.07,386.96 1954.07,386.96 v1(1979.57,361.46) ; v1(2078.98,361.46) 2541.1,361.46 BRD2.20@2871.06,31.5
NetBRD3_1: BRD3.1 C31.2 P6.3 U14.3 | length 1751.6
  Top Layer w15: P6.3@753.94,-1271.46 767.91,-1285.43 C31.2@877.95,-1285.43 ; U14.3@885.83,-163.39 885.83,-192.54 913.57,-192.54 970.57,-249.54 970.57,-666.54 913.57,-723.54 913.57,-842.71 BRD3.1@1010.83,-939.96
  Bottom Layer w15: P6.3@753.94,-1271.46 717.76,-1271.46 671.57,-1225.27 671.57,-963.54 716.57,-918.54 989.41,-918.54 BRD3.1@1010.83,-939.96
NetBRD3_9: BRD3.9 P6.6 | length 845.7
  Bottom Layer w15: P6.6@753.94,-971.46 721.66,-971.46 691.57,-1001.54 691.57,-1201.54 711.57,-1221.54 831.57,-1221.54 844.57,-1234.54 844.57,-1403.63 BRD3.9@1010.83,-1569.88
NetBRD3_16: BRD3.16
NetBRD3_18: BRD3.18 R9.2 U4.1 | length 3862.8
  Top Layer w15: v1(942.57,317.46) 967.57,342.46 1008.86,342.46 U4.1@1008.86,371.06 ; BRD3.18@1876.97,-1097.44 1839.47,-1059.94 1839.47,-993.54 1853.47,-979.54 1906.57,-979.54 1926.57,-959.54 1926.57,-865.4 2042.43,-749.54 2042.43,-691.69 2075.57,-658.54 2075.57,56.46 2091.54,72.42 v1(2091.54,84.65) ; v1(2625.57,63.46) 2780.62,218.5 3113.19,218.5 R9.2@3151.57,256.89
  Bottom Layer w15: v1(942.57,317.46) 987.07,272.96 1598.07,272.96 1783.57,87.46 2106.57,87.46 2103.76,84.65 v1(2091.54,84.65) 2604.39,84.65 v1(2625.57,63.46)
NetC14_2: C14.2 R12.1 U11.11 | length 475.3
  Top Layer w14.17: -2758.55,-93.54 -2665.1,-0.1 U11.11@-2604.33,-0.1
  Top Layer w15: C14.2@-2964.57,-223.42 -2959.19,-218.05 -2927.98,-218.05 -2923.59,-222.44 R12.1@-2901.58,-222.44 -2901.58,-190.19 -2804.93,-93.54 -2758.55,-93.54
NetC15_1: C15.1 U12.9 | length 197
  Top Layer w8.86: -300.93,-342.54 -268.43,-310.04 U12.9@-244.1,-310.04
  Top Layer w15: C15.1@-413.39,-308.07 -378.91,-342.54 -300.93,-342.54
NetC15_2: C15.2 U12.8 | length 117.6
  Top Layer w8.86: -336.62,-290.36 U12.8@-244.1,-290.36
  Top Layer w15: C15.2@-354.33,-308.07 -336.62,-290.36
NetC17_2: C17.2 U10.9 | length 78.2
  Top Layer w8.86: 138.13,1.42 U10.9@169.54,1.42
  Top Layer w15: C17.2@91.53,1.97 137.57,1.97 138.13,1.42
NetC19_1: C19.1 U12.7 | length 311.3
  Top Layer w8.86: -395.81,-270.67 U12.7@-244.1,-270.67
  Top Layer w15: C19.1@-410.43,-117.13 -410.43,-256.04 -395.81,-270.67
NetC21_2: C21.2 R24.1 U11.6 | length 1049.6
  Top Layer w14.17: -2923.54,-29.39 -2923.54,-5.93 -2842.25,-5.93 -2836.43,-0.1 U11.6@-2791.34,-0.1
  Top Layer w15: R24.1@-3146.65,212.6 -3146.65,289.37 C21.2@-3090.55,345.47 -3132.54,387.46 -3180.93,387.46 -3195.43,372.96 -3195.43,168.96 -3181.93,155.46 -3094.43,155.46 -3012.11,73.14 -3012.11,-10.71 -2993.43,-29.39 -2923.54,-29.39
NetC22_2: C22.2 R23.2 | length 459.6
  Top Layer w15: R23.2@-3143.7,-233.27 -3120.08,-256.89 C22.2@-3120.08,-683.07
NetC25_2: C25.2 U10.27 X1.2 | length 266.6
  Top Layer w8.86: U10.27@294.48,21.1 298.57,21.1 299.87,22.4 335.4,22.4
  Top Layer w15: 335.4,22.4 388.78,75.79 X1.2@408.46,75.79 C25.2@538.39,75.79
NetC26_2: C26.2 U10.26 X1.1 | length 325.8
  Top Layer w8.86: U10.26@294.48,1.42 318.57,1.42
  Top Layer w15: 318.57,1.42 356.57,-36.58 357.57,-101.38 X1.1@408.46,-101.38 473.57,-101.38 474.56,-102.36 C26.2@540.35,-102.36
NetD1_2: D1.2 R2.1 | length 619.3
  Top Layer w15: D1.2@1598.46,890.75 1624.87,890.75 1640.57,906.46 1640.57,1136.92 1742.57,1238.92 1742.57,1354.86 R2.1@1686.02,1411.42
NetJP1_2: JP1.2 U12.13 | length 5238.8
  Top Layer w8.86: -218.5,-801.12 U12.13@-218.5,-394.69
  Top Layer w15: v1(-621.43,1217.46) -648.43,1190.46 -648.43,405.46 -518.93,275.96 -518.93,-856.04 -506.43,-868.54 -285.93,-868.54 -218.5,-801.12 ; v1(989.57,1920.46) 999.02,1929.9 JP1.2@999.02,2001.97
  Bottom Layer w15: v1(-621.43,1217.46) -621.43,1424.46 -620.43,1425.46 -543.43,1425.46 -528.43,1410.46 -528.43,1362.96 -463.93,1298.46 -185.43,1298.46 94.57,1578.46 349.57,1578.46 425.07,1653.96 925.57,1653.96 940.57,1668.96 940.57,1871.46 v1(989.57,1920.46)
NetJP2_1: JP2.1 Q1.4 U11.16 | length 2361.8
  Top Layer w14.17: U11.16@-2604.33,124.9 -2530.93,124.9 -2510.48,104.46
  Top Layer w15: Q1.4@-3004.92,-341.34 -3052.72,-341.34 -3067.43,-356.04 -3067.43,-531.04 -3013.82,-584.65 -2986.03,-584.65 -2942.43,-541.04 -2942.43,-523.17 -2812.79,-393.54 -2515.43,-393.54 -2455.53,-333.65 -2455.53,-318.72 -2281.35,-144.54 -2035.93,-144.54 -2016.93,-125.54 -2016.93,15.46 -2155.43,153.96 -2441.43,153.96 -2442.43,152.96 -2442.43,116.46 -2454.43,104.46 -2510.48,104.46
NetL3_2: L3.2 R25.1 U11.9 | length 1372.7
  Top Layer w14.17: v1(-2703.43,-93.04) -2660.48,-50.1 U11.9@-2604.33,-50.1
  Top Layer w15: v1(-2889.43,53.46) -2904.43,53.46 -2922.43,71.46 -2922.43,221.46 -2912.46,231.42 -2912.46,647.7 -2861.34,698.82 L3.2@-2761.81,698.82 ; -2761.81,794.46 -2745.37,810.9 R25.1@-2745.37,908.46
  Top Layer w100: L3.2@-2761.81,698.82 -2761.81,794.46
  Bottom Layer w15: v1(-2889.43,53.46) -2742.93,-93.04 v1(-2703.43,-93.04)
NetNTC1_2: NTC1.2 R24.2 | length 1097.1
  Top Layer w15: R24.2@-3087.6,212.6 -3043.78,212.6 -3017.43,238.96 -3017.43,328.46 -2991.55,354.33 v1(-2976.38,354.33) ; NTC1.2@-2483.27,134.84 -2483.27,160.45 -2396.27,247.46 v1(-2361.93,247.46)
  Bottom Layer w15: v1(-2976.38,354.33) -2949.3,354.33 -2802.61,207.64 -2401.74,207.64 v1(-2361.93,247.46)
NetP5_2: P5.2
NetP6_2: P6.2
NetQ2_4: Q2.4 U11.13 | length 879.6
  Top Layer w14.17: v1(-2678.43,37.46) -2665.98,49.9 U11.13@-2604.33,49.9
  Top Layer w15: Q2.4@-3222.44,478.15 -3171.62,478.15 -3037.43,343.96 -3037.43,311.96 v1(-3064.93,284.46)
  Bottom Layer w15: v1(-3064.93,284.46) -2925.43,284.46 v1(-2678.43,37.46)
NetR1_2: R1.2 U1.8 | length 534.3
  Top Layer w15: U1.8@27.56,1477.56 26.57,1477.56 26.57,1792.46 90.57,1856.46 90.57,1893.96 103.07,1906.46 140.06,1906.46 152.56,1918.96 R1.2@152.56,1937.01
NetR11_1: R11.1 U12.23 | length 1117.4
  Top Layer w8.86: U12.23@-94.49,-290.36 -50.43,-290.36
  Top Layer w15: -50.43,-290.36 -38.43,-278.36 v4(-38.43,-190.54) ; v1(263.57,399.46) 281.44,417.32 R11.1@342.52,417.32
  Bottom Layer w15: v4(-38.43,-190.54) 33.57,-118.54 251.07,-118.54 263.57,81.72 209.84,135.46 209.84,345.72 v1(263.57,399.46)
NetR13_1: R13.1 U12.22 | length 88.7
  Top Layer w8.86: U12.22@-94.49,-310.04 -36.42,-310.04
  Top Layer w15: -36.42,-310.04 R13.1@-14.76,-331.69
NetR14_1: R14.1 U12.19 | length 1178.1
  Top Layer w8.86: U12.19@-94.49,-369.1 0.52,-369.1
  Top Layer w15: 0.52,-369.1 13.57,-356.04 13.57,-277.04 v1(6.57,-270.04) ; R14.1@325.79,256.89 v1(325.79,302.46)
  Bottom Layer w15: v1(6.57,-270.04) 39.07,-237.54 342.57,-237.54 347.57,-232.54 347.57,96.46 290.07,153.96 290.07,266.74 v1(325.79,302.46)
NetR15_1: R15.1 U12.20 | length 1374.7
  Top Layer w8.86: v4@-178.83,-349.41 U12.20@-94.49,-349.41
  Top Layer w15: v4(-183.69,-344.54) v4@-178.83,-349.41 ; v1(469.57,263.78) R15.1@537.4,263.78
  Bottom Layer w15: v4(-183.69,-344.54) 391.07,-344.54 469.57,-266.04 v1(469.57,263.78)
NetR17_1: R17.1 U10.4 | length 843.9
  Top Layer w8.86: v4(221.21,28.46) U10.4@221.21,65.47
  Top Layer w15: R17.1@-434.06,292.32 -411.43,269.69 v1(-411.43,197.46)
  Bottom Layer w15: v1(-411.43,197.46) -242.43,28.46 v4(221.21,28.46)
NetR18_1: R18.1 U10.11 | length 606.5
  Top Layer w8.86: U10.11@169.54,-37.95 194.07,-37.95
  Top Layer w15: v1(-210.63,-72.54) R18.1@-210.63,48.23 ; 194.07,-37.95 209.57,-53.45 v4(209.57,-72.54)
  Bottom Layer w15: v1(-210.63,-72.54) v4(209.57,-72.54)
NetR20_1: R20.1 U11.4 | length 250.7
  Top Layer w14.17: U11.4@-2791.34,49.9 -2736.4,49.9 -2734.89,51.41 -2734.89,66.66 -2715.79,85.76 -2715.79,188.16
  Top Layer w15: -2715.79,188.16 -2705.13,198.82 R20.1@-2671.26,198.82
NetR21_2: R21.2 U10.5 | length 836
  Top Layer w8.86: U10.5@201.52,65.47 201.52,127.14
  Top Layer w15: 201.52,127.14 v1(247.34,172.96) ; v1(581.52,491.46) 595.47,477.5 R21.2@595.47,410.43
  Bottom Layer w15: v1(247.34,172.96) 247.34,277.46 309.84,339.96 309.84,480.22 337.12,507.5 565.47,507.5 v1(581.52,491.46)
NetR23_1: R23.1 U11.7 | length 595.2
  Top Layer w14.17: -2907.7,-66.5 -2866.3,-25.1 U11.7@-2791.34,-25.1
  Top Layer w15: R23.1@-3202.76,-233.27 -3174.03,-204.54 -3115.43,-204.54 -3067.43,-252.54 -2993.43,-251.54 -2993.43,-194.54 -2907.7,-108.82 -2907.7,-66.5
NetR26_2: R26.2 U10.6 | length 3894.2
  Top Layer w8.86: U10.6@169.54,60.47 176.57,60.47 176.57,178.81
  Top Layer w15: 176.57,178.81 226.22,228.46 331.57,228.46 347.57,212.46 v1(347.57,211.46) ; v1(2492.57,250.46) 2492.12,250.01 2492.12,90.55 2589.57,-6.89 2884.49,-6.89 3183.07,-305.47 R26.2@3183.07,-558.07
  Bottom Layer w15: v1(347.57,211.46) 404.57,268.46 404.57,348.96 419.07,363.46 1116.07,363.46 1186.57,292.96 1624.07,292.96 1666.57,250.46 v1(2492.57,250.46)
NetU11_15: U11.15 U13.1 | length 2019.7
  Top Layer w14.17: U11.15@-2604.33,99.9 -2654.43,99.9 -2660.71,106.19 -2660.71,143.58 -2659.43,144.86 -2538.11,144.86 -2390.51,292.46
  Top Layer w15: U13.1@-2775.59,-442.91 -2532.8,-442.91 -2435.53,-345.65 -2435.53,-327 -2273.07,-164.54 -2015.93,-164.54 -1996.93,-145.54 -1996.93,31.46 -2257.93,292.46 -2390.51,292.46
RAW: J1.1 J2.1 PTC2.1 | length 3866.7
  Top Layer w100: PTC2.1@-2554.13,1363.19 -2342.16,1363.19 v3(-1930.43,951.46)
  Bottom Layer w100: v3(-1930.43,951.46) -710.83,951.46 ; J1.1@-218.51,1683.07 -339.38,1803.95 -457.31,1803.95 -710.83,1550.42 -710.83,951.46 ; J2.1@-206.69,900.59 -304.83,802.46 -542.43,802.46 -691.43,951.46 -710.83,951.46
RAWIN: C16.1 C18.2 PTC2.2 Q1.5 Q1.6 Q1.7 Q1.8 U11.1 Z2.1 | length 5218.2
  Top Layer w14.17: U11.1@-2791.34,124.9 -2773.65,124.9 v3@-2773.65,259.92
  Top Layer w21.26: v3@-3195.87,-600.1 v3(-3195.87,-588.54)
  Top Layer w28.35: C18.2@-3124.02,-863.19 -3065.66,-921.54
  Top Layer w100: v3(-3195.87,-588.54) Q1.8@-3195.87,-491.34 Q1.7@-3195.87,-441.34 Q1.6@-3195.87,-391.34 Q1.5@-3195.87,-341.34 ; -3065.66,-921.54 -2753.65,-921.54 C16.1@-2651.58,-1023.62 ; Z2.1@-2742.13,1108.27 -2651.43,1108.27 -2646.51,1103.35 PTC2.2@-2554.13,1103.35 -2355.93,1103.35 -2310.43,1057.85 v3(-2310.43,479.96)
  Bottom Layer w100: v3(-3195.87,-588.54) v3@-3175.87,-608.54 ; v3@-3187.43,-608.54 v3@-3175.87,-608.54 ; v3(-2763.43,270.14) -2763.43,275.14 -2644.61,393.96 -2310.43,393.96 v3(-2310.43,479.96) -2281.49,451.02 -2281.49,-124.98 -2216.93,-189.54 -2216.93,-532.21 -2409.13,-724.41 -2950.79,-724.41 -2981.73,-693.46 ; C16.1@-2651.58,-1023.62 -2981.73,-693.46 ; v3@-3175.87,-608.54 -3090.95,-693.46 -2981.73,-693.46
SOLENOID: D2.1 J3.2 U3.2 U3.4 U4.2 U4.4 U5.2 U5.4 Z1.2 | length 3773.9
  Top Layer w49.5: v1(1892.57,555.46) 1903.54,544.49 D2.1@1903.54,499.02 ; 3064.96,667.32 Z1.2@3064.96,752.42
  Top Layer w60: U3.2@783.46,371.06 U3.4@783.46,619.09 ; U4.2@1099.41,371.06 U4.4@1099.41,619.09 ; U5.2@1415.35,371.06 U5.4@1415.35,619.09
  Top Layer w70.87: U3.4@783.46,619.09 988.57,619.09 U4.4@1099.41,619.09 U5.4@1340.57,619.09 ; U5.4@1415.35,619.09 U5.4@1340.57,619.09 ; v3(1424.21,474.41) 1424.21,499.97 1322.83,601.35 U5.4@1340.57,619.09
  Top Layer w100: J3.2@2943.9,546.26 3064.96,667.32
  Bottom Layer w100: v3(1424.21,474.41) 1331.62,474.41 1350.57,455.46 1817.57,455.46 v1@1905.07,542.96 ; v1(1892.57,555.46) v1@1905.07,542.96 ; J3.2@2943.9,546.26 2800.7,689.46 2051.57,689.46 v1@1905.07,542.96
XOUT: BRD1.36 C10.2 P7.2 U7.6 | length 2117.8
  Top Layer w15: v1(2594.57,1349.46) 2594.49,1349.37 U7.6@2594.49,1281.89 2594.49,1243.27 2606.3,1231.46 C10.2@2606.3,1192.91
  Bottom Layer w15: BRD1.36@1297.83,1596.46 1348.33,1646.96 1916.5,1646.96 1954.57,1685.03 1954.57,1724.96 1969.07,1739.46 2368.79,1739.46 2460.57,1831.24 ; P7.2@2556.5,1927.16 2460.57,1831.24 ; v1(2594.57,1349.46) 2460.57,1483.46 2460.57,1831.24
YOUT: BRD1.37 C12.2 P7.5 U9.6 | length 2115.1
  Top Layer w15: P7.5@2256.5,1927.16 2256.5,1590.96 v1(2281.5,1565.96) ; v1(2420.27,992.76) C12.2@2420.27,882.87 2463.57,882.87 2469.48,888.78 U9.6@2514.17,888.78
  Bottom Layer w15: BRD1.37@1397.83,1596.46 1427.17,1567.12 2080.91,1567.12 2094.57,1553.46 2269,1553.46 v1(2281.5,1565.96) 2281.5,1360.53 2420.27,1221.76 v1(2420.27,992.76)
pads on no net: Bat1.0 Bat2.0 Bat3.0 BRD2.4 BRD2.6 BRD2.7 BRD2.8 BRD2.12 BRD2.13 BRD2.14 BRD2.18 BRD3.4 BRD3.6 BRD3.7 BRD3.8 BRD3.12 BRD3.13 BRD3.14 BRD3.20 BRD4.0 BRD4.1 BRD4.2 J1.0 J2.0 J3.0 J5.0 P7.4 SD1.1 SD1.8 SD1.9 U7.1 U7.2 U7.5 U8.3 U8.10 U8.11 U9.1 U9.2 U9.5 U10.1 U10.7 U10.8 U10.12 U10.13 U10.21 U10.22 U10.23 U10.24 U12.1 U12.10 U12.11 U12.12 U12.14

## Polygon pours and split planes (outlines as drawn)
GND on Top Layer "GND_L01_P001" (solid, remove dead copper, pour order 1): -3240.35,-978.31 cw(c-3240.35,-928.31) -3290.35,-928.31 -3290,-928.31 -3290,928.31 cw(c-3240,928.31) -3240,978.31 ccw(c-3240,1420) -2798.31,1420 -2798.31,1900 -2798.43,1900 cw(c-2598.43,1900) -2598.43,2100 2598.43,2100 cw(c2598.43,1900) 2798.43,1900 2798.31,1900 2798.31,1420 ccw(c3240,1420) 3240,978.31 cw(c3240,928.31) 3290,928.31 3290,-928.31 cw(c3240,-928.31) 3240,-978.31 ccw(c3240,-1420) 2798.31,-1420 2798.31,-1900 2798.43,-1900 cw(c2598.43,-1900) 2598.43,-2100 -2598.78,-2100 cw(c-2598.78,-1900) -2798.78,-1900 -2798.66,-1900 -2798.66,-1420 ccw(c-3240.35,-1420)
GND on Bottom Layer "GND_L02_P002" (solid, remove dead copper, pour order 2): -3240.35,-978.31 cw(c-3240.35,-928.31) -3290.35,-928.31 -3290,-928.31 -3290,928.31 cw(c-3240,928.31) -3240,978.31 ccw(c-3240,1420) -2798.31,1420 -2798.31,1900 -2798.43,1900 cw(c-2598.43,1900) -2598.43,2100 2598.43,2100 cw(c2598.43,1900) 2798.43,1900 2798.31,1900 2798.31,1420 ccw(c3240,1420) 3240,978.31 cw(c3240,928.31) 3290,928.31 3290,-928.31 cw(c3240,-928.31) 3240,-978.31 ccw(c3240,-1420) 2798.31,-1420 2798.31,-1900 2798.43,-1900 cw(c2598.43,-1900) 2598.43,-2100 -2598.78,-2100 cw(c-2598.78,-1900) -2798.78,-1900 -2798.66,-1900 -2798.66,-1420 ccw(c-3240.35,-1420)

## Keep-outs
Keep-Out Layer:
  lines w5: -3290.35,-928.31 ccw(c-3240.35,-928.31) -3240.35,-978.31 cw(c-3240.35,-1420) -2798.66,-1420 -2798.66,-1900 ; -3290,928.31 cw(c-3240,928.31) -3240,978.31 ccw(c-3240,1420) -2798.31,1420 -2798.31,1900 ; -3290,-928.31 -3290,928.31 ; -2798.78,-1900 ccw(c-2598.78,-1900) -2598.78,-2100 ; -2798.43,1900 cw(c-2598.43,1900) -2598.43,2100 2598.42,2100 cw(c2598.43,1900) 2798.43,1900 ; -2598.43,-2100 2598.42,-2100 ccw(c2598.43,-1900) 2798.43,-1900 ; 2798.31,-1900 2798.31,-1420 cw(c3240,-1420) 3240,-978.31 ccw(c3240,-928.31) 3290,-928.31 3290,928.31 ccw(c3240,928.31) 3240,978.31 cw(c3240,1420) 2798.31,1420 2798.31,1900

## Other copper
Top Layer:
  rectangle net GND: 643.7,-50.2 1533.46,245.08
Bottom Layer:
  rectangle net GND: 643.7,-50.2 1533.46,245.08
Multi-Layer:
  lines w10: 337.6,899.61 337.6,901.58 ; 638.78,1200.79 640.75,1200.79

## Silkscreen, mask and mechanical layers (free items; w line width, h text height)
Top Overlay:
  lines w10: 294.29,1165.35 374.02,1245.08 ; 296.26,1242.13 300.2,1242.13 376.97,1165.35 377.95,1165.35 ; 332.68,1000 239.17,1000 337.6,901.58 ; 336.61,1139.76 336.61,1000 437.36,1000 338.27,900.91 ; 393.26,1205.82 ccw(c336.61,1201.77) 393.39,1200.78 ; 396.65,1199.8 540.35,1199.8 540.35,1300.55 639.45,1201.46 ; 540.35,1195.87 540.35,1102.36 638.78,1200.79
  text "+V" at 2175.2,1997.05 h40 r90
  text "X" at 2274.02,1997.05 h40 r90
  text "ST" at 2471.65,1997.05 h40 r90
  text "Y" at 2570.47,1997.05 h40 r90
  text "-V" at 2669.29,1997.05 h40 r90
  text "GND" at -580.71,1980.32 h40
  text "CAN L" at -113.19,1980.32 h40
  text "M3" at -2643.7,1830.71 h60
  text "GND" at -34.45,1721.46 h40
  text "CAN H" at -662.4,1664.37 h40
  text "Vin" at -121.06,1663.39 h40
  text "M3" at 2331.69,1641.73 h60
  text "S1" at 19.69,1516.73 h40
  text "TX3" at -562.01,1451.77 h40 r90
  text "GND" at -317.91,1364.17 h40
  text "Z" at 231.3,1258.86 h80
  text "Teensy 3.2" at 1683.07,1249.02 h40
  text "X" at 715.55,1237.21 h80 r180
  text "GND" at -551.18,1214.57 h40
  text "CAN L" at -83.66,1214.57 h40
  text "CAN H" at -632.87,898.62 h40
  text "Vin" at -91.54,897.64 h40
  text "Y" at 313.98,809.06 h80
  text "Ultimate GPS" at -333.66,509.29 h40
  text "GND" at 1606.3,-565.94 h40
  text "XBee Pro 2.4" at 2472.44,-669.29 h40 r90
  text "TX2" at 2545.28,-1224.41 h40 r270
  text "GND" at 2754.92,-1224.41 h40 r270
  text "GND" at -2710.75,-1227.36 h40
  text "5V" at -2670.76,-1337.6 h40
  text "SW" at 1977.36,-1364.5 h60
  text "Servo0" at -2760.83,-1431.1 h30
  text "GND" at 831.69,-1512.8 h40
  text "BAT" at 1977.36,-1526.25 h60
  text "XBee Pro 900" at 1443.9,-1571.85 h40 r90
  text "GND" at 644.69,-1600.39 h40
  text "12V" at 1977.36,-1687.99 h60
  text "M3" at 2544.29,-1880.91 h60
  text "M3" at -2682.09,-1892.72 h60

## Text inside footprints (layer, text, board x,y; h text height)
Bat1: Top Overlay "MPD BK-18650-PC2 / or / Keystone 1043P" at -1018.66,54.8 h40 r90; Top Overlay "18650 Li-ION" at -1515.75,933.07 h40 r90; Top Overlay "Negative" at -963.66,2049.8 h40 r180; Top Overlay "+" at -1063.66,-1080.2 h80 r180; Bottom Overlay "+" at -1073.66,-1080.2 h80 r180
Bat2: Top Overlay "+" at -2010.16,1982.76 h80; Top Overlay "Negative" at -2110.16,-1147.24 h40; Top Overlay "18650 Li-ION" at -1388.78,708.66 h40 r270; Top Overlay "MPD BK-18650-PC2 / or / Keystone 1043P" at -2055.16,847.76 h40 r270; Bottom Overlay "+" at -2000.16,1982.76 h80
Bat3: Top Overlay "MPD BK-18650-PC2 / or / Keystone 1043P" at -1281.81,-1641.77 h40; Top Overlay "18650 Li-ION" at -1116.81,-1096.77 h40; Top Overlay "Negative" at 713.19,-1696.77 h40 r90; Top Overlay "+" at -2416.81,-1596.77 h80 r90; Bottom Overlay "+" at -2416.81,-1586.77 h80 r90
Batt1: Top Overlay "Neg" at 1774.61,190.55 h40 r90; Top Overlay "+" at 1674.61,590.55 h40 r90; Top Overlay "Battery" at 1774.61,440.55 h40 r90; Bottom Overlay "Neg" at 1799.61,297.18 h40 r90; Bottom Overlay "+" at 1674.61,617.21 h40 r90
BRD1: Top Overlay "USB" at 947.83,1316.46 h60 r90; Top Overlay "GND" at 917.83,916.43 h40 r90; Top Overlay "RX1 0" at 1017.83,843.12 h40 r90; Top Overlay "TX1 1" at 1117.83,846.46 h40 r90; Top Overlay "2" at 1217.83,996.41 h40 r90; Top Overlay "CANTX 3" at 1317.83,756.48 h40 r90; Top Overlay "CANRX 4" at 1417.83,756.48 h40 r90; Top Overlay "5" at 1517.83,996.41 h40 r90; Top Overlay "6" at 1617.83,996.41 h40 r90; Top Overlay "RX3 7" at 1717.83,836.46 h40 r90; Top Overlay "TX3 8" at 1817.83,836.46 h40 r90; Top Overlay "TX2 10" at 2017.83,803.13 h40 r90; Top Overlay "RX2 9" at 1917.83,836.46 h40 r90; Top Overlay "SDI 12" at 2217.83,809.8 h40 r90; Top Overlay "SDO 11" at 2117.83,816.46 h40 r90; Top Overlay "15 A1" at 2017.83,1766.46 h40 r90; Top Overlay "16 A2" at 1917.83,1766.46 h40 r90; Top Overlay "17 A3" at 1817.83,1766.46 h40 r90; Top Overlay "18 SDA" at 1717.83,1766.46 h40 r90; Top Overlay "19 SCL" at 1617.83,1766.46 h40 r90; Top Overlay "20 A6" at 1517.83,1766.46 h40 r90; Top Overlay "21 A7" at 1417.83,1766.46 h40 r90; Top Overlay "22 A8" at 1317.83,1766.46 h40 r90; Top Overlay "23 A9" at 1217.83,1766.46 h40 r90; Top Overlay "3.3V" at 1117.83,1766.46 h40 r90; Top Overlay "AGND" at 1017.83,1766.46 h40 r90; Top Overlay "Vin" at 917.83,1766.46 h40 r90; Top Overlay "A10" at 1322.83,1443.11 h40 r90; Top Overlay "A11" at 1417.83,1456.44 h40 r90; Bottom Overlay "15 A1" at 2012.83,1948.07 h40 r90; Bottom Overlay "14 A0" at 2112.83,1961.4 h40 r90; Bottom Overlay "17 A3" at 1812.83,1961.4 h40 r90; Bottom Overlay "21 A7" at 1412.83,1961.4 h40 r90; Bottom Overlay "AGND" at 1012.83,1928.08 h40 r90; Bottom Overlay "3.3V" at 1112.83,1921.41 h40 r90; Bottom Overlay "Vin" at 912.83,1881.42 h40 r90; Bottom Overlay "16 A2" at 1912.83,1961.4 h40 r90; Bottom Overlay "19 SCL" at 1612.83,2001.39 h40 r90; Bottom Overlay "23 A9" at 1212.83,1968.06 h40 r90; Bottom Overlay "13 SCK" at 2212.83,2001.39 h40 r90; Bottom Overlay "18 SDA" at 1712.83,2001.39 h40 r90; Bottom Overlay "20 A6" at 1512.83,1968.06 h40 r90; Bottom Overlay "22 A8" at 1312.83,1968.06 h40 r90; Bottom Overlay "3.3V" at 2276.21,1320.19 h40 r180; Bottom Overlay "GND" at 2276.21,1418.94 h40 r180; Bottom Overlay "VBat" at 2276.21,1221.44 h40 r180; Bottom Overlay "A14" at 2276.21,1616.44 h40 r180; Bottom Overlay "Program" at 2276.21,1517.69 h40 r180; Bottom Overlay "6" at 1622.83,1018.06 h40 r90; Bottom Overlay "5" at 1522.83,1018.06 h40 r90; Bottom Overlay "2" at 1222.83,1018.06 h40 r90; Bottom Overlay "TX2 10" at 2022.83,1018.06 h40 r90; Bottom Overlay "RX2 9" at 1922.83,1018.06 h40 r90; Bottom Overlay "TX1 1" at 1122.83,1018.06 h40 r90; Bottom Overlay "SDO 11" at 2122.83,1018.06 h40 r90; Bottom Overlay "SDI 12" at 2222.83,1018.06 h40 r90; Bottom Overlay "TX3 8" at 1822.83,1018.06 h40 r90; Bottom Overlay "RX3 7" at 1722.83,1018.06 h40 r90; Bottom Overlay "RX1 0" at 1022.83,1018.06 h40 r90; Bottom Overlay "GND" at 922.83,1018.06 h40 r90; Bottom Overlay "CANRX 4" at 1422.83,1018.06 h40 r90; Bottom Overlay "CANTX 3" at 1322.83,1018.06 h40 r90; Bottom Overlay "A11" at 1417.83,1548.08 h40 r90; Bottom Overlay "A10" at 1322.83,1548.08 h40 r90; Bottom Overlay "AREF" at 1217.83,1548.08 h40 r90; Bottom Overlay "VUSB" at 1062.83,1548.08 h40 r90; Bottom Overlay "USB" at 947.83,1476.46 h60 r90
BRD2: Top Overlay "1" at 1897.99,17.17 h40; Top Overlay "10" at 1857.99,-692.83 h40; Top Overlay "11" at 2957.99,-692.83 h40; Top Overlay "20" at 2940.94,6.89 h40
BRD3: Top Overlay "1" at 903.9,-954.29 h40; Top Overlay "10" at 863.9,-1664.29 h40; Top Overlay "11" at 1856.3,-1755.91 h40; Top Overlay "20" at 1742.13,-932.09 h40